# Altium PCB Copy of motor_driver.PcbDoc
Units mil, origin at the board's own origin, x right, y up, seen from the top; angles counter-clockwise.
Board outline 6000 x 4000 mil, 2 copper layers (Top Layer, Bottom Layer); 9 components, 11 nets, 37 pads, 2 vias.
Unrouted connection lines stored in the file: 17.
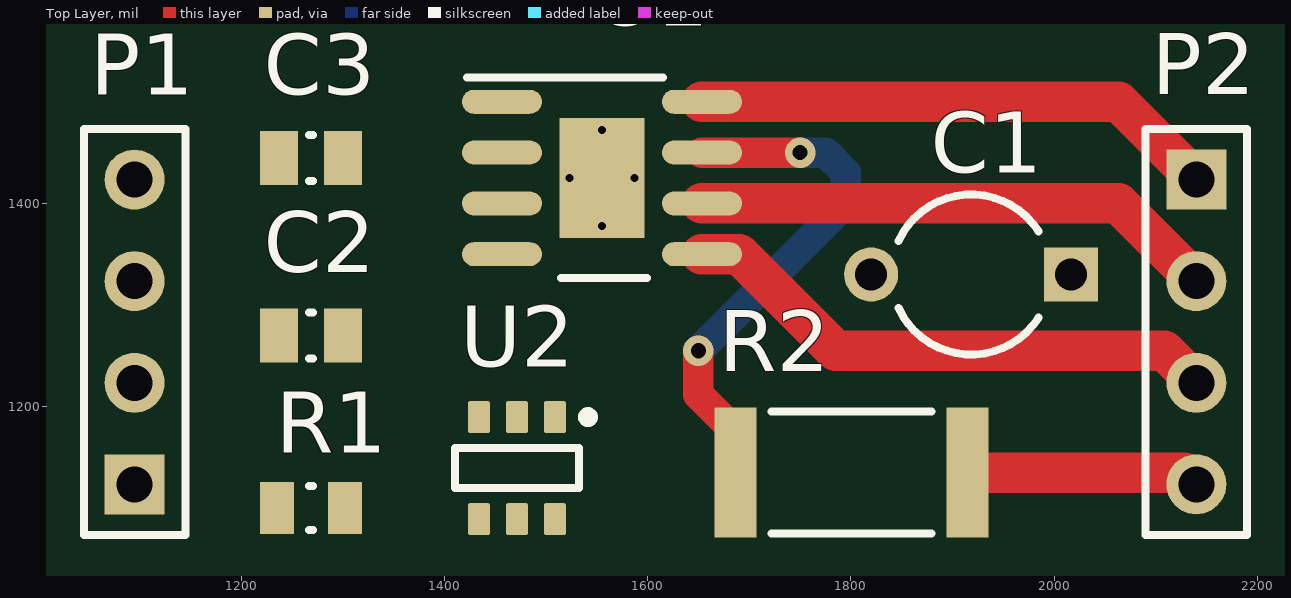
[diagram p0: Top Layer view]
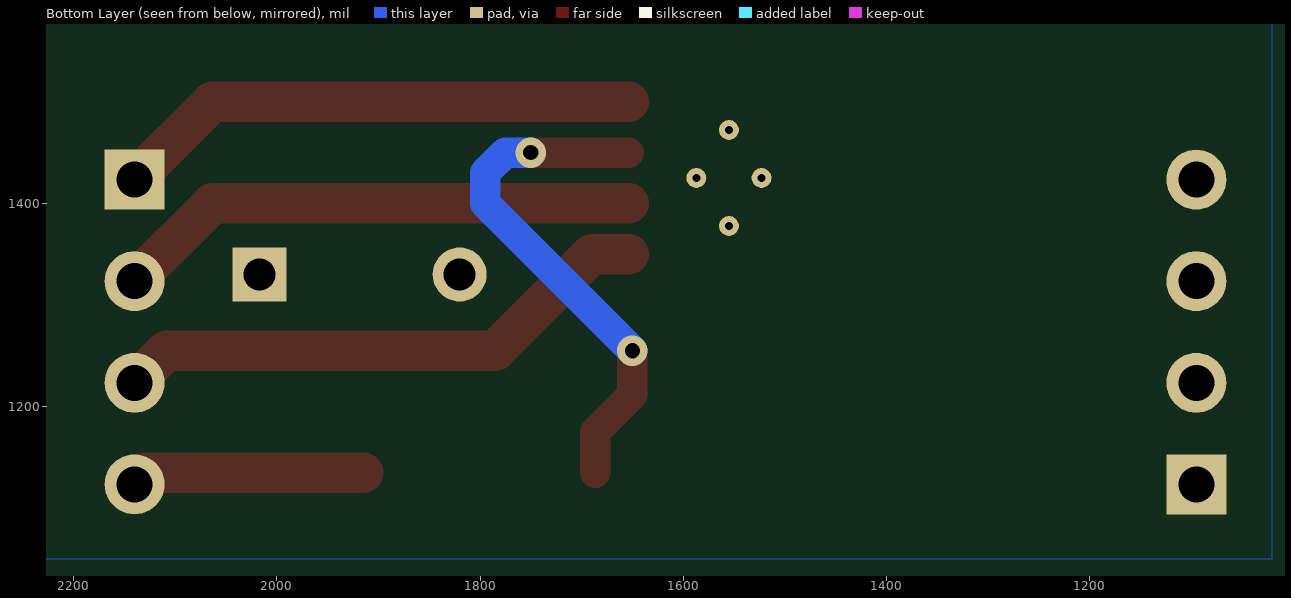
[diagram p1: Bottom Layer view, seen from below]

## Layer stack, top to bottom
Top Solder: solder mask 0.4, Solder Resist, Dk 3.5
Top Layer: signal copper 1.4
Dielectric 1: dielectric 12.6, FR-4, Dk 4.8
Bottom Layer: signal copper 1.4
Bottom Solder: solder mask 0.4, Solder Resist, Dk 3.5

## Board outline
1000,1000 7000,1000 7000,5000 1000,5000

## Design rules (kind name [scope] priority, off if disabled: settings)
Clearance [All] p1: gap=10 ignorepadtopadclearanceinfootprint=FALSE except(0: Arc-Hole Track-Hole SMDPad-Hole THPad-Hole Via-Hole Fill-Hole Poly-Hole Region-Hole Text-Hole)
PolygonConnect [All] p1: connectstyle=Relief reliefconductorwidth=10 reliefentries=4 polygonreliefangle="90 Angle" airgapwidth=10
RoomDefinition motor_driver [InComponentClass('motor_driver')] p1: confinementstyle=ConfineIn formatcopy=TRUE lockcomponents=FALSE outline 1020,1050 2240,1050 2240,1650 1020,1650
RoutingVias [All] p1: holewidth=28 width=50 viastyle="Through Hole" minholewidth=8 minwidth=20 maxholewidth=28 maxwidth=50
SolderMaskExpansion [All] p1: expansion=4
Width [All] p1: maxlimit=10 minlimit=10 preferedwidth=10
30 further rules are at their usual default settings.

## Components (designator, comment, footprint, x,y, rotation, side; value= is the part's Value field where it differs from the comment)
C1 "100uF" CAPR5-4X5 1918.43,1330 r180 top
C2 "10nF" CAPC0805(2012)145_L 1268.46,1270 r180 top
C3 "10nF" CAPC0805(2012)145_L 1268.46,1444.88 r180 top
P1 "Header 4" HDR1X4 1095,1123.43 r90 top
P2 "Header 4" HDR1X4 2140,1423.43 r270 top
R1 "10k" RESC0805(2012)_L 1268.46,1100 r0 top
R2 "0.1 Shunt Resistor" RESC2512(6432)_L 1800.83,1135 r180 top
U1 "DRV8872DDAR" DDA0008H_N 1555,1425 r0 top value=Value
U2 "SN74LVC1G18DBVR" DBV0006A_L 1471.34,1139.43 r270 top

## Footprints (in the part's own frame and the unit in brackets; to place one, negate y for a bottom-side part, rotate by r counter-clockwise, add the part's x,y. Pads: shape width x height; smd on the part's side, far side on the other; paste and mask are expansions set on the pad)
CAPC0805(2012)145_L [mm]
  rect 0.95x1.35 smd: 1(-0.8,0) 2(0.8,0)
  silkscreen extent -0.05,-0.58 0.05,0.58, body extent -1.1,-0.72 1.1,0.72, height 1.45
CAPR5-4X5 [mm] "Capacitor; 2 Leads"
  rect 1.35x1.35 hole 0.8: 1(-2.5,0)
  round 1.35 hole 0.8: 2(2.5,0)
  silkscreen extent -1.69,-2 1.82,2
DBV0006A_L [mm] "SOT23, 6-Leads, Body 3.05x1.75mm, Pitch 0.95mm, IPC High Density"
  rrect18% 0.8x0.55 smd: 1(-1.275,0.95) 2(-1.275,0) 3(-1.275,-0.95) 4(1.275,-0.95) 5(1.275,0) 6(1.275,0.95)
  silkscreen extent -1.4,-1.55 0.5,1.9, body extent -1.42,-1.46 1.42,1.46, height 1.11
DDA0008H_N [mm]
  oval 2x0.6 smd paste+0 mask+0.051: 1(-2.5,1.905) 2(-2.5,0.635) 3(-2.5,-0.635) 4(-2.5,-1.905) 5(2.5,-1.905) 6(2.5,-0.635) 7(2.5,0.635) 8(2.5,1.905)
  rect 2.13x3 smd paste+0 mask+0.051: 9(0,0)
  round 0.5 / inner round 1.524 / far side round 0.5 hole 0.203 mask+0.051: V(-0.815,0) V(0,-1.2) V(0,1.2) V(0.815,0)
  silkscreen extent -3.38,-2.5 1.53,2.51, body extent 0,0 0.25,0.25, height 0.25
HDR1X4 [mm] "Connector; Header; 4 Position"
  rect 1.5x1.5 hole 0.9: 1(0,0)
  round 1.5 hole 0.9: 2(2.54,0) 3(5.08,0) 4(7.62,0)
  silkscreen extent -1.27,-1.27 8.89,1.27
RESC0805(2012)_L [mm]
  rect 0.85x1.3 smd: 1(-0.85,0) 2(0.85,0)
  silkscreen extent -0.05,-0.55 0.05,0.55, body extent -1.1,-0.67 1.1,0.68, height 0.7
RESC2512(6432)_L [mm]
  rect 1.05x3.25 smd: 1(-2.9,0) 2(2.9,0)
  silkscreen extent -2,-1.52 2,1.53, body extent -3.25,-1.7 3.25,1.7, height 0.75

## Part data
C1: library part Cap2, "Capacitor", PackageDescription="Capacitor; 2 Leads", PackageReference=CAPR5-4X5, Published=23-Sep-2002, Publisher="Altium Limited"
C2 C3: library part CMP-1590-00003-1, "0805 (2012 Metric) Chip Capacitor", Case-EIA=0805, Case-Metric=2012, PackageReference=CAPC0805(2012)145
P1 P2: "Header, 4-Pin", LatestRevisionDate=17-Jul-2002, LatestRevisionNote="Re-released for DXP Platform.", Publisher="Altium Limited"
R1: library part CMP-1591-00002-1, "0805 (2012 Metric) Chip Resistor", Case-EIA=0805, Case-Metric=2012, PackageReference=RESC0805(2012)
R2: library part CMP-1591-00007-1, "2512 (6432 Metric) Chip Resistor", Case-EIA=2512, Case-Metric=6432, PackageReference=RESC2512(6432)
U1: "Imported", Alternate_PartNumber=DRV8872DDA, Manufacturer="Texas Instruments", CompType=IC, MountType=SMT, PackageReference=DDA0008H, PartNumber=DRV8872DDAR, PIN_COUNT=9, RefDes=RefDes, TYPE=TYPE
U2: library part CMP-0859-00184-3, "One of Two Noninverting Demultiplexer with 3-State Deselected Output, DBV0006A, LARGE T&R", F @ Nom Voltage(Max)(Mhz)=150, Generic Part Number=SN74LVC1G18, ICC @ Nom Voltage(Max)(mA)=0.01, Manufacturer="Texas Instruments", Operating Temperature Range(C)="-40 to 85", Rating=Catalog, tpd @ Nom Voltage(Max)(ns)=9.3,5,4.2,3.2, Voltage(Nom)(V)=1.8,2.5,3.3,5, 3-State Output=No, Bits(#)=1, DatasheetVersion=SCES406K, Input Type=CMOS/TTL, Logic=True, Output Drive (IOL/IOH)(Max)(mA)=32/-32, Output Type=CMOS, PackageReference=DBV0006A, Schmitt Trigger=No, Specialty Logic Family=Decoder/Encoder/Multiplexer, Sub-Family=Decoder/Encoder/Multiplexer, Technology Family=LVC, VCC(Max)(V)=5.5, VCC(Min)(V)=1.65

## Via types
v1: diameter 30, hole 15, Top Layer to Bottom Layer, 2 vias

## Nets (pads, with @x,y where several pads share a name; then routed paths per layer and width w, separated by ;. In a path a pad name is that pad's centre, name@x,y a point inside that pad or via, vN(x,y) a via of type N, cw(c..) or ccw(c..) an arc to the next point about the centre after c; other vN are vias at no path point)
+12: C1.1 P2.3 U1.5 | length 539
  Top Layer w40: U1.5 1690,1350 1785,1255 2108.43,1255 P2.3
A_Demux: C2.2 P1.3 U2.3
GND: C1.2 C2.1 C3.1 P2.4 R2.1 U1.1 U1.9 U2.2 | length 229.8
  Top Layer w10: P2.4@2128.43,1135 P2.4
  Top Layer w40: R2.1 P2.4@2128.43,1135
IN1: U1.3 U2.6
IN2: U1.2 U2.4
NetP1_4: P1.4 R2.2 U1.7 | length 527.2
  Top Layer w10: v1(1750,1450) v1@1755,1445
  Top Layer w30: v1(1650,1255) 1650,1211.65 1686.65,1175 R2.2 ; U1.7 v1(1750,1450)
  Bottom Layer w30: v1(1650,1255) 1795,1400 1795,1430 1775,1450 v1(1750,1450)
NetP2_1: P2.1 U1.8 | length 518.3
  Top Layer w40: U1.8 2063.43,1500 P2.1
NetP2_2: P2.2 U1.6 | length 518.3
  Top Layer w40: U1.6 2063.43,1400 P2.2
NetR1_2: R1.2 U1.4
S_Demux: C3.2 P1.2 U2.1
VCC: P1.1 R1.1 U2.5
pads on no net: U1.V

## Polygon pours and split planes (outlines as drawn)
GND on Bottom Layer "Top Layer-No Net" (solid, pour order 2): 2240,1650 2240,1050 1020,1050 1020,1650 2240,1650 2240,1050 1020,1050 1020,1650